# EAGLE board FW2-04-UniversalTimer (EAGLE 6.5.0)
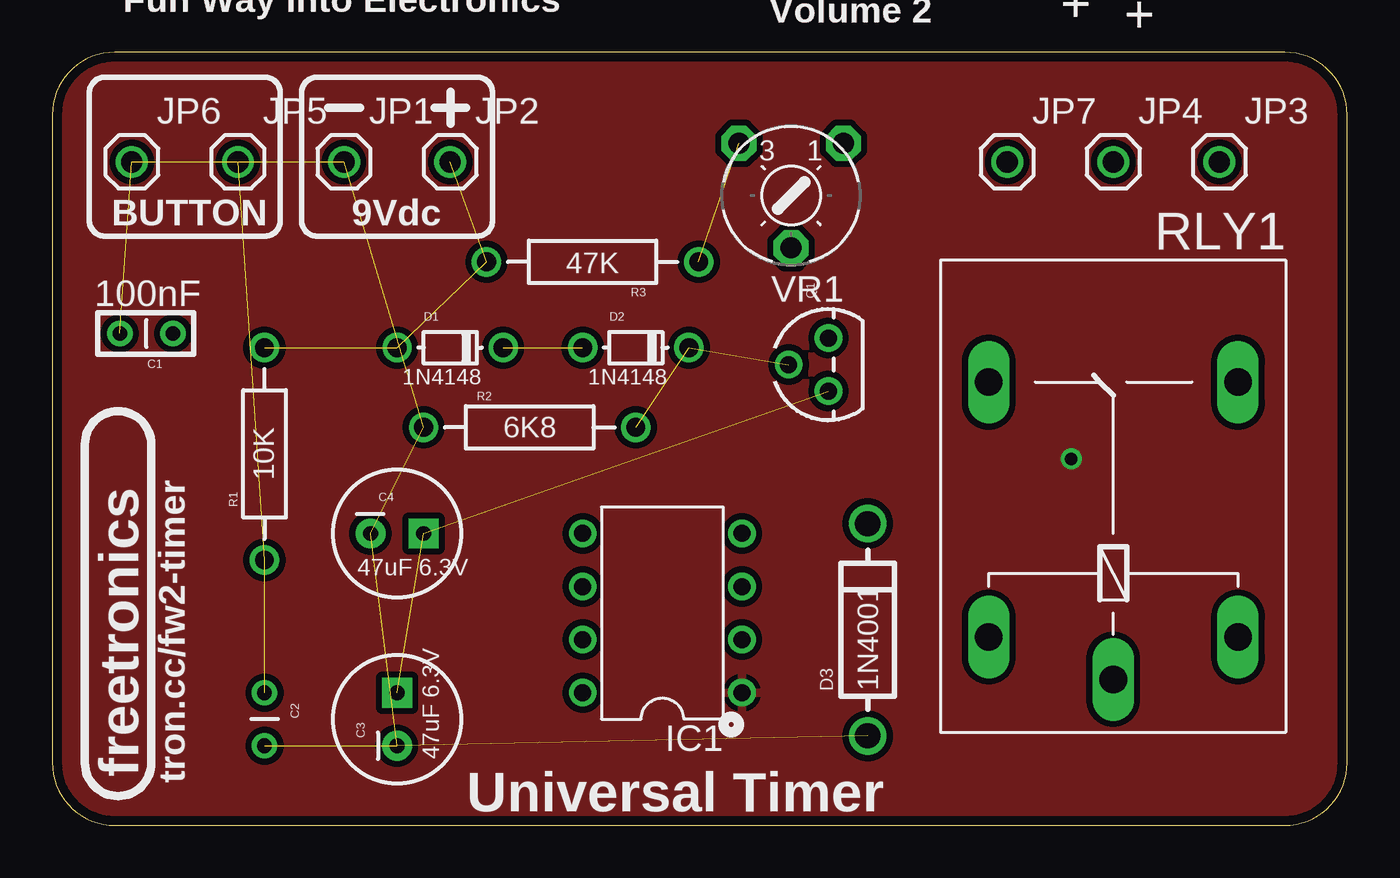
[diagram p0: board, top side]
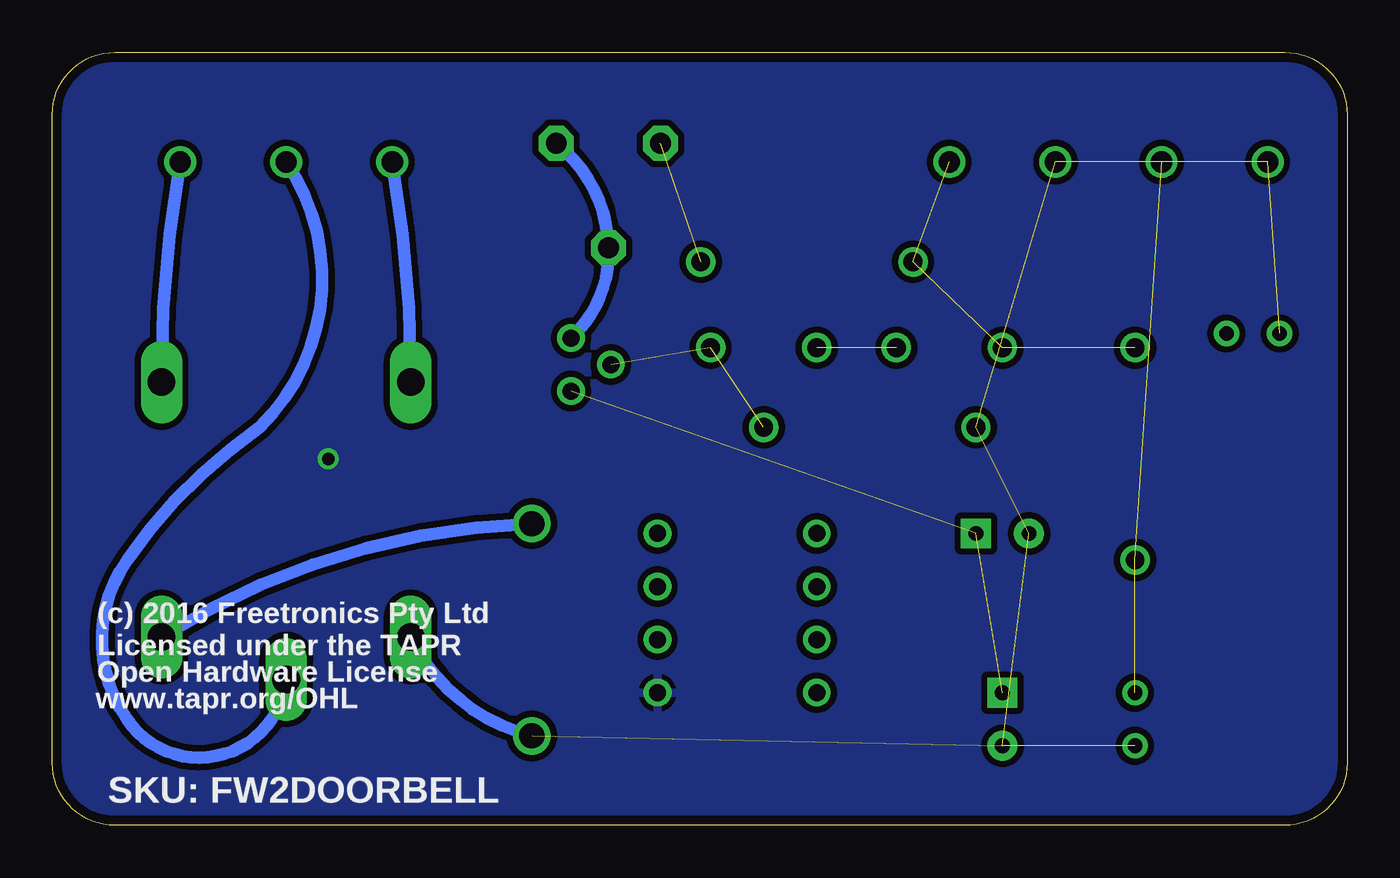
[diagram p1: board, bottom side, seen from below]

Size 62 x 37 mm. Coordinates in mm from the lower left corner, seen from the top.
Outline: 0,3 arc90 3,0 59,0 arc90 62,3 62,34 arc90 59,37 3,37 arc90 0,34 0,3
Copper layers (1*16): Top 0.035mm / dielectric 1.5mm / Bottom 0.035mm
Design rules "default *": minimum track width 10mil, minimum drill 24mil, track to track 12mil, track to pad 12mil, pad to pad 12mil, via to via 12mil, smd to smd 8mil, copper to edge 18mil, drill to drill 8mil, minimum pad ring 10mil, minimum via ring 8mil, stop-mask expansion 4mil, vias tented up to drill 25mil, thermal gap 10mil

## Footprints (pad centres in the part's own frame; a part is rotated, then mirrored left to right if it is on the bottom)
CAP-PTH-SMALL = drill 0.7: 1 0,0; 2 2.54,0
CPOL-RADIAL-10UF-25V = drill 0.7 pad 1.422 square: 1 1.27,0 | drill 0.7 pad 1.422: 2 -1.27,0
DIODE-1N914 = drill 0.9: A -2.54,0; C 2.54,0
DIODE-1N4001 = drill 1.2: A -5.08,0; C 5.08,0
DIL08 = drill 0.813 pad 1.27: 1 -3.81,-3.81; 2 -1.27,-3.81; 3 1.27,-3.81; 4 3.81,-3.81; 5 3.81,3.81; 6 1.27,3.81; 7 -1.27,3.81; 8 -3.81,3.81
1X01 = drill 1.016: 1 0,0
TO-92 = drill 0.813: 1 -1.27,0; 2 0,1.905; 3 1.27,0
FREETRONICS_AXIAL-0.4 = drill 0.9: P$1 -5.08,0; P$2 5.08,0
G5LE = drill 1.321 long: 1 -7.493,-5.969; 2 -7.493,5.969; O 4.699,5.969; P -9.525,0; S 4.699,-5.969
6MM = drill 1 pad 1.676 octagon: A -2.5,-2.5; E 2.5,-2.5; S 0,2.5

## Placement (x,y rotation side)
C1  100nF  [CAP-PTH-SMALL]  5.78,23.54 180 top
C2  100nF  [CAP-PTH-SMALL]  10.16,6.35 270 top
C3  47uF 6.3V  [CPOL-RADIAL-10UF-25V]  16.51,5.08 90 top
C4  47uF 6.3V  [CPOL-RADIAL-10UF-25V]  16.51,13.97 0 top
D1  1N4148  [DIODE-1N914]  19.05,22.86 0 top
D2  1N4148  [DIODE-1N914]  27.94,22.86 0 top
D3  1N4001  [DIODE-1N4001]  39.04,9.36 90 top
IC1  LM555N  [DIL08]  29.21,10.16 90 top
JP1  PWR-  [1X01]  13.97,31.75 0 top
JP2  PWR+  [1X01]  19.05,31.75 0 top
JP3  SPKR+  [1X01]  55.88,31.75 0 top
JP4  SPKR-  [1X01]  50.8,31.75 0 top
JP5  PWR-  [1X01]  8.89,31.75 0 top
JP6  PWR-  [1X01]  3.81,31.75 0 top
JP7  SPKR-  [1X01]  45.72,31.75 0 top
Q1  BC557  [TO-92]  37.16,22.05 90 top
R1  10K  [FREETRONICS_AXIAL-0.4]  10.16,17.78 90 top
R2  6K8  [FREETRONICS_AXIAL-0.4]  22.86,19.05 0 top
R3  47K  [FREETRONICS_AXIAL-0.4]  25.87,26.97 180 top
RLY1  G5LE  [G5LE]  50.8,16.51 90 top
VR1  1M  [6MM]  35.37,30.14 180 top

## Library data of the parts
C1 C2 D3 = freetronics-2
C3 C4 = freetronics-jon.1
D1 D2 JP1-JP7 Q1 = freetronics-master-v1.1
IC1 = freetronics-jon
R1-R3 = freetronics
RLY1 = relay; OC_FARNELL: unknown; OC_NEWARK: unknown
VR1 = adafruit

## Nets
GND: IC1.1
N$1: C3.1 C4.1 Q1.1
N$2: C1.2 C2.2 C3.2 C4.2 D3.A JP1.1 JP6.1 R2.P$1 RLY1.2
N$3: D3.C RLY1.1
N$4: C1.1
N$5: JP4.1 RLY1.P
N$6: JP3.1 RLY1.S
N$7: JP7.1 RLY1.O
N$8: C2.1 JP5.1 R1.P$1
N$9: D2.C Q1.2 R2.P$2
N$10: Q1.3 VR1.A VR1.S
N$11: D1.A JP2.1 R1.P$2 R3.P$2
N$12: R3.P$1 VR1.E
N$13: D1.C D2.A
V+: IC1.8

## Tracks (layer width: path | path; a pad name or v marks a point on that pad's centre or on a via)
GND  (via drill 0.6)
  other vias: 48.78,17.54
  pour Bottom: 0,34 arc-90 3,37 59,37 arc-90 62,34 62,3 arc-90 59,0 3,0 arc-90 0,3
  pour Top: 0,34 arc-90 3,37 59,37 arc-90 62,34 62,3 arc-90 59,0 3,0 arc-90 0,3
N$1  (2 unrouted)
N$2  (7 unrouted)
  Bottom 0.61: RLY1.2 arc-50 D3.A
N$3
  Bottom 0.61: RLY1.1 arc30 D3.C
N$5
  Bottom 0.61: RLY1.P arc140 58.42,5.08 arc70 58.42,12.7 arc20 52.07,19.05 arc-80 JP4.1
N$6
  Bottom 0.61: RLY1.S arc10 JP3.1
N$7
  Bottom 0.61: RLY1.O arc-10 JP7.1
N$8  (2 unrouted)
N$9  (2 unrouted)
N$10
  Bottom 0.61: VR1.A arc50 VR1.S arc50 Q1.3
N$11  (3 unrouted)
N$12  (1 unrouted)
N$13  (1 unrouted)

## Text on the board
tPlace: Compatible with Dick Smith's | "Fun Way Into Electronics" | Volume 2 | + | + | BUTTON | 9Vdc | 100nF | freetronics | tron.cc/fw2-timer | Universal Timer
bPlace: (c) 2016 Freetronics Pty Ltd | Licensed under the TAPR | Open Hardware License | www.tapr.org/OHL | SKU: FW2DOORBELL